# Altium PCB WIFIModule_M_V2.0.1.PcbDoc
Units mm, origin at the board's own origin, x right, y up, seen from the top; angles counter-clockwise.
Board outline 50 x 45 mm, 2 copper layers (Top Layer, Bottom Layer); 59 components, 64 nets, 253 pads, 83 vias.
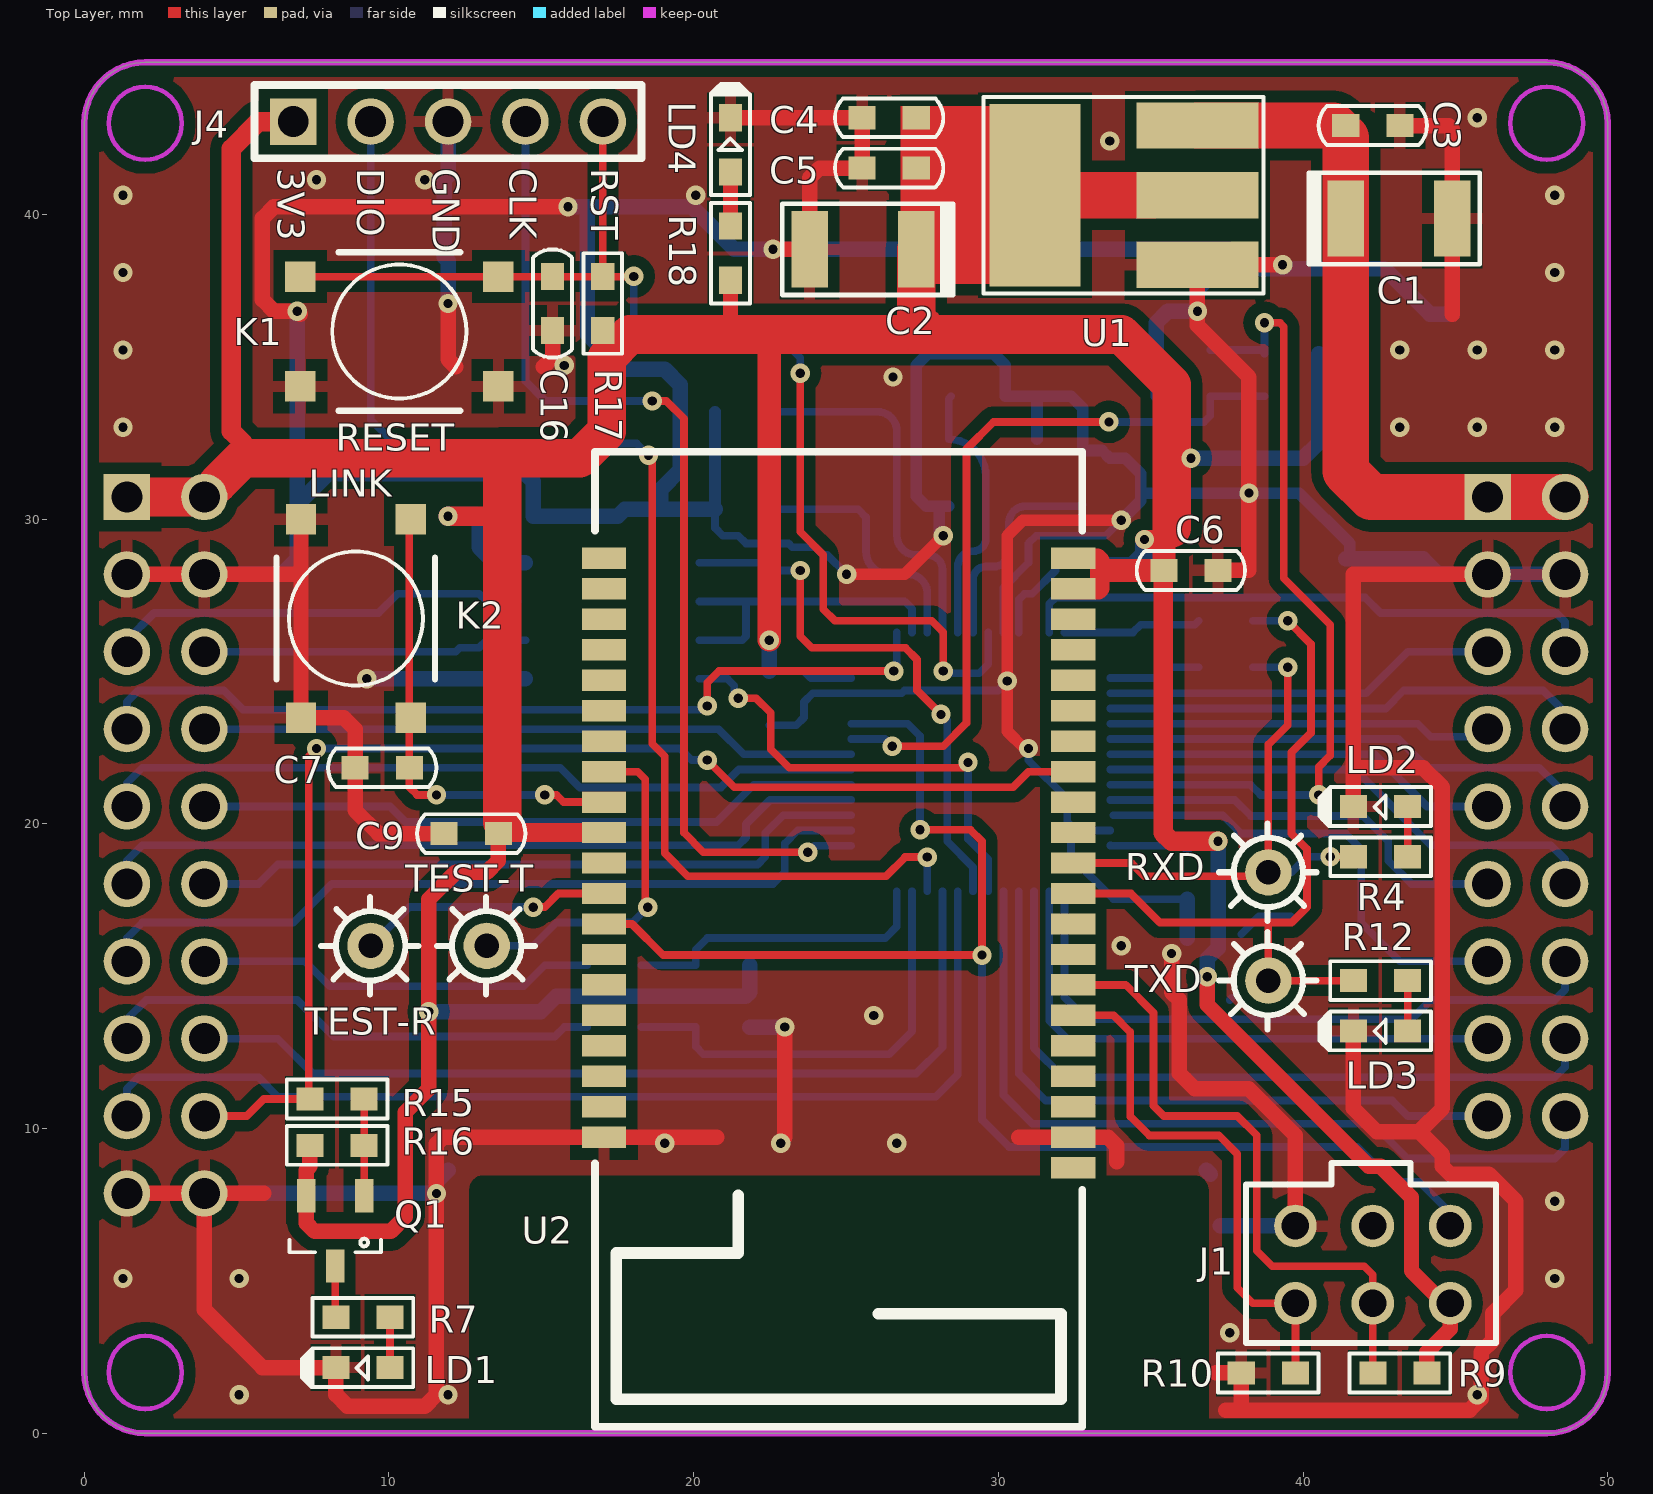
[diagram p0: Top Layer view]
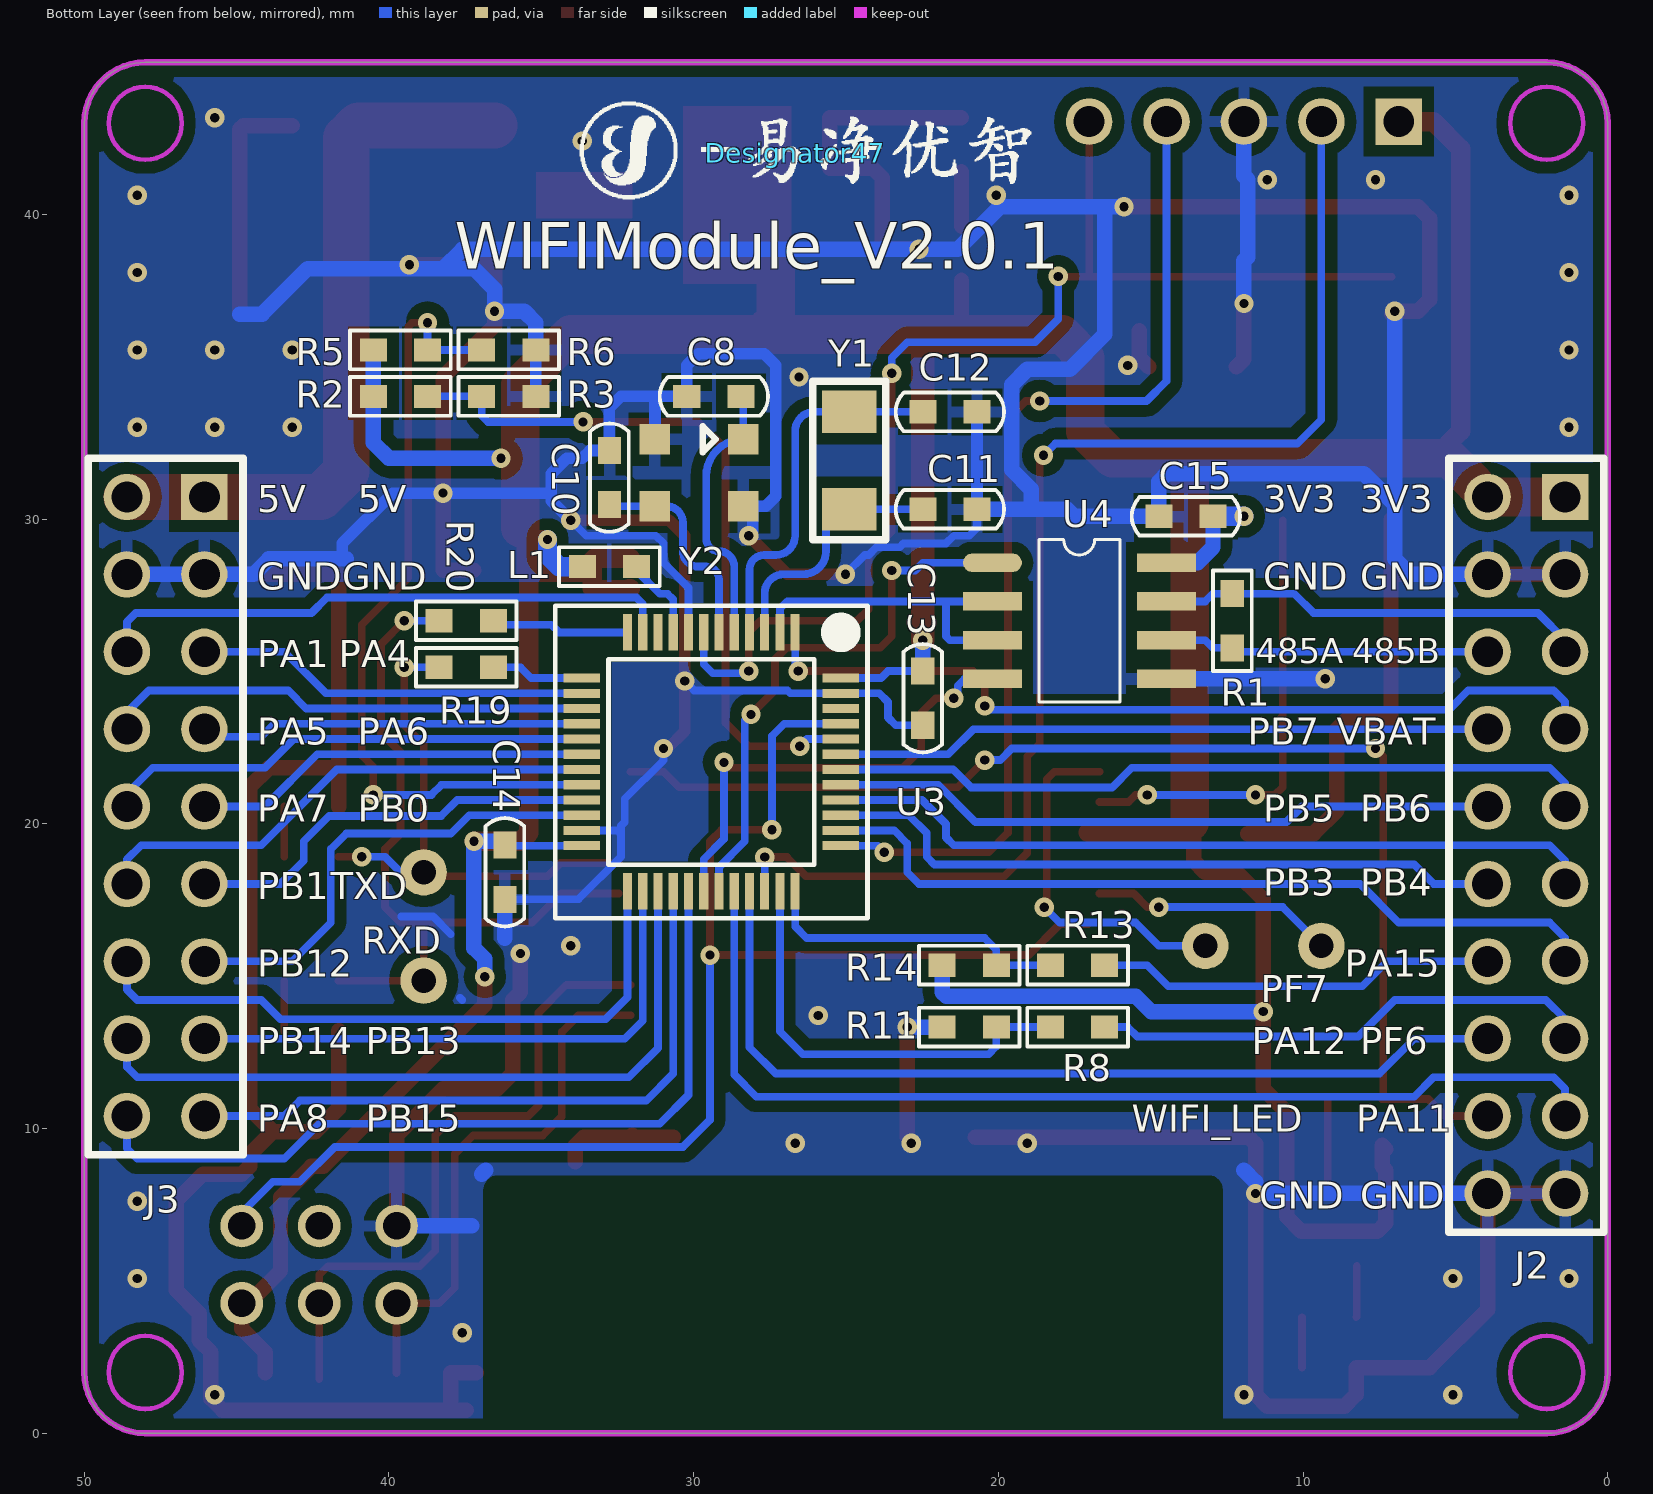
[diagram p1: Bottom Layer view, seen from below]

## Layer stack, top to bottom
Top Layer: signal copper 0.0356
Dielectric: dielectric 0.32, FR-4, Dk 4.8
Bottom Layer: signal copper 0.0356

## Board outline
2,0 cw(c2,2) 0,2 0,43 cw(c2,43) 2,45 48,45 cw(c48,43) 50,43 50,2 cw(c48,2) 48,0

## Design rules (kind name [scope] priority, off if disabled: settings)
Clearance [All] p1: gap=0.178
ComponentClearance [All] p1: gap=0.127 collisioncheckmode=2 verticalgap=0.254
DiffPairsRouting DiffPair_DiffPairsRouting [InDifferentialPair ('NewDifferentialPair1')] p1: maxlimit=2.54 minlimit=0.152 mostfreqgap=0.152 maxuncoupledlength=12.7
DiffPairsRouting [All] p2: maxlimit=2.54 minlimit=0.152 mostfreqgap=0.152 maxuncoupledlength=12.7
MatchedLengths DiffPair_MatchedLengths [InDifferentialPair ('NewDifferentialPair1')] p1: tolerance=25.4 checknetsindiffpair=TRUE checkdiffpairvsdiffpair=TRUE checkothers=TRUE
PlaneClearance [All] p1: clearance=0.15
PlaneConnect [All] p1: planeconnectstyle=Relief reliefexpansion=0.508 reliefentries=4 reliefconductorwidth=0.508 reliefairgap=0.254
PolygonConnect [All] p1: connectstyle=Relief reliefconductorwidth=0.381 reliefentries=4 polygonreliefangle="90 Angle"
RoutingCorners [All] p1: cornerstyle=Round minsetback=10 maxsetback=10
RoutingVias [All] p1: holewidth=0.711 width=1.27 viastyle="Through Hole" minholewidth=0.305 minwidth=0.635 maxholewidth=1.27 maxwidth=1.27
SolderMaskExpansion [All] p1: expansion=0.102
TestPointUsage [All] p1: valid=0 allowmultiple=FALSE
Testpoint [All] p1: side=15 testpointundercomponent=TRUE minsize=1.016 maxsize=2.54 preferedsize=1.524 minholesize=0 maxholesize=1.016 preferedholesize=0.813 testpointgrid=0.025 style=1021 order=0123456789
Width DiffPair_Width [InDifferentialPair('NewDifferentialPair1')] p1: maxlimit=0.381 minlimit=0.381 preferedwidth=0.381
Width [All] p2: maxlimit=5.08 minlimit=0.254 preferedwidth=0.381
14 further rules are at their usual default settings.

## Components (designator, comment, footprint, x,y, rotation, side; value= is the part's Value field where it differs from the comment)
C1 "47uF/25V" C_TAN_B 41.402,39.878 r0 top
C2 "47uF/25V" C_TAN_B 27.305,38.862 r180 top
C3 "0.1uF" 0603_C 41.402,42.926 r0 top
C4 "0.1uF" 0603_C 27.305,43.18 r180 top
C5 "1uF" 0603_C 27.305,41.529 r180 top
C6 "0.1uF" 0603_C 37.211,28.321 r180 top
C7 "0.1uF" 0603_C 10.668,21.844 r180 top
C8 "22PF" 0603_C 28.448,34.036 r0 bottom
C9 "0.1uF" 0603_C 11.811,19.685 r0 top
C10 "22PF" 0603_C 32.766,30.48 r90 bottom
C11 "10PF" 0603_C 22.479,30.328 r180 bottom
C12 "10PF" 0603_C 22.479,33.528 r180 bottom
C13 "Cap" 0603_C 22.479,25.019 r270 bottom
C14 "Cap" 0603_C 36.195,19.304 r270 bottom
C15 "Cap" 0603_C 12.954,30.099 r0 bottom
C16 "Cap" 0603_C 15.367,36.195 r90 top
Designator47 "Comment" PIC_AIRFACTORY-1500 26.67,42.037 r180 bottom
J1 "header-2x3-2d54" HT8550_FLASH_LOADER 42.291,5.537 r180 top
J2 "Header2X10" DIP20-2.54-2.54 1.397,30.734 r270 bottom
J3 "HEADER2X9" DIP18-2.54-2.54 46.063,30.734 r270 bottom
J4 "XH2.54-5P" SIP5 6.858,43.053 r0 top
K1 "KEY" KEY_SMD5465 13.589,34.366 r180 top
K2 "KEY" KEY_SMD5465 7.112,23.495 r90 top
L1 "Inductor" 0603_R 33.655,28.448 r180 bottom
LD1 "WHITE" LED_0603 10.033,2.159 r180 top
LD2 "LED_B" LED_0603 43.434,20.574 r180 top
LD3 "LED_Y" LED_0603 43.434,13.208 r180 top
LD4 "LED_B" LED_0603 21.209,41.402 r90 top
Q1 "2N3906" SOT23 9.184,7.798 r270 top (schematic designator Q3)
R1 "120Ω" 0603_R 12.319,27.559 r270 bottom
R2 "NC" 0603_R 38.735,34.036 r0 bottom
R3 "10K" 0603_R 35.179,34.036 r0 bottom
R4 "1K" 0603_R 41.656,18.923 r0 top
R5 "NC" 0603_R 38.735,35.56 r0 bottom
R6 "10K" 0603_R 35.179,35.56 r0 bottom
R7 "470" 0603_R 10.033,3.81 r180 top
R8 "NC" 0603_R 16.51,13.335 r0 bottom
R9 "10K" 0603_R 44.069,1.981 r180 top
R10 "10K" 0603_R 37.973,1.981 r0 top
R11 "0R" 0603_R 20.066,13.335 r0 bottom
R12 "1K" 0603_R 41.656,14.859 r0 top
R13 "NC" 0603_R 16.51,15.367 r0 bottom
R14 "0R" 0603_R 20.066,15.367 r0 bottom
R15 "4.7K" 0603_R 9.184,10.973 r180 top
R16 "47K" 0603_R 7.406,9.449 r0 top
R17 "10K" 0603_R 17.018,37.973 r270 top
R18 "1K" 0603_R 21.209,37.846 r90 top
R19 "1K" 0603_R 36.576,25.146 r0 bottom
R20 "1K" 0603_R 36.576,26.67 r0 bottom
RXD "Wi-Fi_TXD" TP_60_30 38.862,18.415 r0 top (schematic designator TP1)
TEST-R "TEST_RX" TP_60_30 9.398,16.002 r0 top (schematic designator TP4)
TEST-T "TEST_TX" TP_60_30 13.208,16.002 r0 top (schematic designator TP3)
TXD "Wi-Fi_RXD" TP_60_30 38.862,14.859 r0 top (schematic designator TP2)
U1 "AMS1117-3.3" SOT223 33.869,40.64 r0 top
U2 "WIFI_3165" EMW3165-P 17.058,28.719 r180 top
U3 "STM32F103C8T6" LQFP48 26.67,26.289 r0 bottom
U4 "MAX3485ESA" SO8 20.193,28.575 r180 bottom
Y1 "32.768K" 3215 24.892,33.528 r270 bottom
Y2 "8MHz" CRY_S3225 29.972,31.623 r270 bottom

## Footprints (in the part's own frame and the unit in brackets; to place one, negate y for a bottom-side part, rotate by r counter-clockwise, add the part's x,y. Pads: shape width x height; smd on the part's side, far side on the other; paste and mask are expansions set on the pad)
0603_C [mil]
  rect 35x30 smd: 1(0,0) 2(70,0)
  silkscreen extent -35,-25 105,25, body extent 5,-15 65,15, height 39
0603_R [mil]
  rect 35x30 smd: 1(0,0) 2(70,0)
  silkscreen extent -30,-25 100,25, body extent 5,-15 65,15, height 39
3215 [mm]
  rect 1.4x1.8 smd: 1(0,0) 2(3.2,0)
  silkscreen extent -1,-1.2 4.2,1.2
C_TAN_B [mm]
  rect 1.2x2.5 smd: 1(0,0) 2(3.5,0)
  silkscreen extent -1.24,-1.5 4.39,1.53, body extent 0,-1.5 3.5,1.5, height 2
CRY_S3225 [mm]
  rect 1x1 smd: 1(-1.005,1.602) 2(-1.005,-1.298) 3(1.195,-1.298) 4(1.195,1.602)
  silkscreen extent -1.44,0.27 -0.57,0.7, body extent -1.61,-1.9 1.8,2.2, height 1
DIP18-2.54-2.54 [mil]
  rect 60x60 hole 40: 1(0,0)
  round 60 hole 40: 2(0,-100) 3(100,0) 4(100,-100) 5(200,0) 6(200,-100) 7(300,0) 8(300,-100) 9(400,0) 10(400,-100) 11(500,0) 12(500,-100) 13(600,0) 14(600,-100) 15(700,0) 16(700,-100) 17(800,0) 18(800,-100)
  silkscreen extent -50,-150 850,50
DIP20-2.54-2.54 [mil]
  rect 60x60 hole 40: 1(0,0)
  round 60 hole 40: 2(0,-100) 3(100,0) 4(100,-100) 5(200,0) 6(200,-100) 7(300,0) 8(300,-100) 9(400,0) 10(400,-100) 11(500,0) 12(500,-100) 13(600,0) 14(600,-100) 15(700,0) 16(700,-100) 17(800,0) 18(800,-100) 19(900,0) 20(900,-100)
  silkscreen extent -50,-150 950,50
EMW3165-P [mm]
  rect 1.45x0.7 smd: 1(0,0) 2(0,1) 3(0,2) 4(0,3) 5(0,4) 6(0,5) 7(0,6) 8(0,7) 9(0,8) 10(0,9) 11(0,10) 12(0,11) 13(0,12) 14(0,13) 15(0,14) 16(0,15) 17(0,16) 18(0,17) 19(0,18) 20(0,19) 21(-15.4,19) 22(-15.4,18) 23(-15.4,17) 24(-15.4,16) 25(-15.4,15) 26(-15.4,14) 27(-15.4,13) 28(-15.4,12) 29(-15.4,11) 30(-15.4,10) 31(-15.4,9) 32(-15.4,8) 33(-15.4,7) 34(-15.4,6) 35(-15.4,5) 36(-15.4,4) 37(-15.4,3) 38(-15.4,2) 39(-15.4,1) 40(-15.4,0) 41(-15.4,20)
  silkscreen extent -15.7,-3.5 0.3,28.5, body extent -16.23,-3.63 0.83,28.63, height 3
HT8550_FLASH_LOADER [mm]
  round 1.4 hole 0.9: 1(-2.54,1.27) 2(-2.54,-1.27) 3(0,1.27) 4(0,-1.27) 5(2.54,1.27) 6(2.54,-1.27)
  silkscreen extent -4.04,-3.33 4.16,2.57, body extent -4.04,-3.33 4.16,2.57, height 2.54
KEY_SMD5465 [mm]
  rect 1x1 smd: 1(0,0) 2(0,-3.6) 3(6.5,0) 4(6.5,-3.6)
  silkscreen extent 1.05,-4.4 5.45,0.8, body extent -0.25,-4.06 6.73,0.46, height 1.5
LED_0603 [mil]
  rect 35x30 smd: A(0,0) K(70,0)
  silkscreen extent -30,-25 114,25
LQFP48 [mm]
  rect 0.3x1.2 smd: 1(0,0) 2(0.5,0) 3(1,0) 4(1.5,0) 5(2,0) 6(2.5,0) 7(3,0) 8(3.5,0) 9(4,0) 10(4.5,0) 11(5,0) 12(5.5,0) 25(5.5,8.5) 26(5,8.5) 27(4.5,8.5) 28(4,8.5) 29(3.5,8.5) 30(3,8.5) 31(2.5,8.5) 32(2,8.5) 33(1.5,8.5) 34(1,8.5) 35(0.5,8.5) 36(0,8.5)
  rect 1.2x0.3 smd: 13(7,1.5) 14(7,2) 15(7,2.5) 16(7,3) 17(7,3.5) 18(7,4) 19(7,4.5) 20(7,5) 21(7,5.5) 22(7,6) 23(7,6.5) 24(7,7) 37(-1.5,7) 38(-1.5,6.5) 39(-1.5,6) 40(-1.5,5.5) 41(-1.5,5) 42(-1.5,4.5) 43(-1.5,4) 44(-1.5,3.5) 45(-1.5,3) 46(-1.5,2.5) 47(-1.5,2) 48(-1.5,1.5)
  silkscreen extent -2.38,-0.88 7.88,9.38
PIC_AIRFACTORY-1500 [mm]
  silkscreen extent -7.06,-1.52 7.75,1.65
SIP5 [mil] "SIP5"
  rect 60x60 hole 40: 1(0,0)
  round 60 hole 40: 2(100,0) 3(200,0) 4(300,0) 5(400,0)
  silkscreen extent -50,-47 450,47
SO8 [mil]
  oval 76x24 smd: 1(0,0)
  rect 76x24 smd: 2(0,-50) 3(0,-100) 4(0,-150) 5(225,-150) 6(225,-100) 7(225,-50) 8(225,0)
  silkscreen extent 60,-180 165,30
SOT23 [mm]
  rect 1.092x0.6 smd: 1(0,0) 2(0,-1.9) 3(2.308,-0.95)
  silkscreen extent 1.41,-2.45 1.85,0.55, body extent 0.45,-2.45 1.85,0.55, height 1.1
SOT223 [mil]
  rect 157.48x60 smd: 1(105,-90) 2(105,0) 3(105,90)
  rect 118.11x236.22 smd: 4(-105,0)
  silkscreen extent -172,-127 190,127
TP_60_30 [mil]
  round 60 hole 31.5: 1(0,0)
  silkscreen extent -64,-63 62,63

## Part data
C1 C2: library part ECAP, "E-CAP"
C3 C4 C5 C6 C9: library part "Cap Semi_1", "Capacitor"
C7: library part "CAP NP"
C8 C10 C11 C12: library part Cap, "Capacitor"
C13 C14 C15 C16: "Capacitor"
J4: library part "Header 5H", "Header, 5-Pin, Right Angle"
LD1: library part LED, "LED"
LD2 LD3 LD4: library part LED
Q1: library part PNP
R1: library part RES1
R2 R3 R5 R6 R7 R8 R9 R10 R11 R13 R14 R15 R16 R17 R19 R20: library part Res3, "Resistor"
R4 R12 R18: library part R
RXD TEST-R TEST-T TXD: library part "T POINT A"
U4: library part MAX485
Y1: library part XTAL, "Crystal Oscillator"
Y2: library part CRYSTAL_S4_1, "CRYSTAL_S4_PASSIVE"

## Via types
v1: diameter 0.635, hole 0.305, Top Layer to Bottom Layer, tented both sides, 83 vias

## Nets (pads, with @x,y where several pads share a name; then routed paths per layer and width w, separated by ;. In a path a pad name is that pad's centre, name@x,y a point inside that pad or via, vN(x,y) a via of type N, cw(c..) or ccw(c..) an arc to the next point about the centre after c; other vN are vias at no path point)
485_A: J2.6 R1.2 U4.6 | length 10.7
  Bottom Layer w0.254: J2.6 12.192,25.654 R1.2 12.954,25.781 13.208,26.035 U4.6
485_B: J2.5 R1.1 U4.7 | length 13.9
  Bottom Layer w0.254: J2.5 1.397,26.035 2.286,26.924 9.652,26.924 10.287,27.559 12.954,27.559 13.208,27.305 U4.7@14.224,27.305
485_CTRL: U3.2 U4.2 U4.3 | length 10.6
  Bottom Layer w0.254: U4.3 21.59,26.035 21.717,26.162 21.717,27.305 ; U4.2 26.924,27.305 27.17,27.059 U3.2
+3.3V: C2.1 C4.1 C5.1 C6.2 C9.2 C13.1 C14.1 C15.1 J1.1 J2.1 J2.2 J4.1 L1.1 Q1.2 R2.2 R5.2 R9.1 R14.2 R16.1 R17.2 R18.1 U1.2 U1.4 U2.10 U2.39 U2.40 U3.24 U3.48 U4.8 | length 178.2
  Top Layer w0.508: R16.1@7.284,9.327 R16.1 7.406,8.758 7.284,8.636 7.284,6.903 7.558,6.629 10.058,6.629 10.541,7.112 10.541,10.541 11.303,11.303 11.303,17.526 12.192,18.415 13.208,18.415 13.589,18.796 C9.2 ; 14.16,31.559 14.224,31.623 ; 21.209,36.449 R18.1 ; 35.814,32.004 v1(36.322,32.004) ; v1(36.855,14.986) 36.855,14.072 42.164,8.763 42.545,8.763 43.561,7.747 43.561,5.334 44.628,4.267 J1.1 44.831,3.429 44.069,2.667 R9.1
  Top Layer w0.635: 5.207,32.512 4.826,32.893 4.826,42.164 5.715,43.053 J4.1 ; v1(11.938,30.099) 13.081,30.099 ; C9.2@13.809,19.719 U2.10 ; U2.40@32.077,28.719 33.257,28.719 33.325,28.651 33.325,27.737 33.274,27.686 32.11,27.686 32.077,27.719 U2.39@32.11,27.719 ; v1(34.798,29.337) 35.433,29.337 ; C6.2@35.408,28.477 35.408,19.71 35.687,19.431 v1(37.211,19.431)
  Top Layer w0.762: v1(22.479,26.035) 22.479,35.687 22.86,36.068 ; 33.452,28.321 C6.2 35.433,29.337
  Top Layer w1.27: J2.1 J2.2 ; J2.2@4.381,31.178 5.207,32.004 13.589,32.004 13.716,31.877 ; 13.716,20.066 13.716,32.004 16.256,32.004 17.145,32.893 17.145,35.306 17.907,36.068 34.036,36.068 35.687,34.417 35.687,29.718 ; C2.1 27.305,36.576 27.559,36.322
  Bottom Layer w0.254: C13.1 23.622,25.019 23.852,24.789 U3.48 ; U3.24@33.685,19.304 U3.24 36.18,19.289 C14.1
  Bottom Layer w0.508: v1(11.303,13.843) 14.986,13.843 15.494,14.351 21.717,14.351 21.844,14.478 R14.2 ; C15.1@12.827,30.099 12.954,29.972 12.954,29.083 13.462,28.575 U4.8 ; C13.1 v1(22.479,26.035) ; C14.1 36.322,19.431 v1(37.211,19.431) 37.211,15.926 36.855,15.57 v1(36.855,14.986) ; v1(36.322,32.004) 40.005,32.004 40.513,32.512 R5.2@40.513,35.433
  Bottom Layer w0.635: v1(11.938,30.099) C15.1@12.827,30.099 ; L1.1 34.417,28.448 34.798,28.829 v1(34.798,29.337)
+5V: C1.1 C3.1 J3.1 J3.2 U1.3 | length 23.5
  Top Layer w1.524: U1.3 40.996,42.926 41.402,42.52 41.402,31.572 42.24,30.734 J3.2
BOOT0: R2.1 R3.2 U3.44 | length 24.1
  Top Layer w0.254: v1(26.518,22.555) 28.194,22.555 28.956,23.317 28.956,32.309 29.845,33.198 v1(33.63,33.198)
  Bottom Layer w0.254: U3.44 26.284,22.789 v1(26.518,22.555) ; v1(33.63,33.198) 36.754,33.198 36.957,33.401 R3.2 R2.1
BOOT1: R5.1 R6.2 U3.20 | length 26.6
  Top Layer w0.254: v1(38.735,36.449) 39.243,36.449 39.37,36.322 39.37,28.067 40.894,26.543 40.894,22.25 40.513,21.869 v1(40.513,20.955)
  Bottom Layer w0.254: U3.20 38.274,21.289 38.608,20.955 v1(40.513,20.955) ; R6.2 R5.1 ; R5.1@38.735,35.433 v1(38.735,36.449)
EASY_LINK: C7.1 K2.2 K2.4 U2.9 | length 15.1
  Top Layer w0.254: K2.2@10.668,23.451 K2.2 K2.2@10.668,23.539 ; K2.4@10.668,29.972 10.668,21.209 10.922,20.955 v1(11.557,20.955) ; v1(15.113,20.955) 15.494,20.955 15.73,20.719 U2.9@16.677,20.719
  Bottom Layer w0.254: v1(11.557,20.955) v1(15.113,20.955)
GND: C1.2 C2.2 C3.2 C4.2 C5.2 C6.1 C7.2 C8.2 C9.1 C10.2 C11.2 C12.2 C13.2 C14.2 C15.2 C16.1 J1.6 J2.3 J2.4 J2.19 J2.20 J3.3 J3.4 J4.3 K1.1 K1.3 K2.1 K2.3 LD1.K LD2.K LD3.K LD4.K R3.1 R6.1 R10.1 R11.2 U1.1 U2.20 U2.21 U3.8 U3.23 U3.47 U4.5 Y2.2 Y2.4 | length 367.5
  Top Layer w0.254: 15.229,35.168 15.367,35.306
  Top Layer w0.381: v1(25.019,28.194) 26.924,28.194 v1(28.194,29.464) ; v1(30.988,22.479) 30.861,22.479 30.297,23.043 30.297,29.464 30.805,29.972 v1(34.036,29.972)
  Top Layer w0.508: J2.19 5.893,7.874 ; J2.3 7.112,28.194 ; J2.20 3.937,4.064 5.842,2.159 LD1.K 8.255,1.27 8.636,0.889 11.176,0.889 11.557,1.27 11.557,9.5 11.776,9.719 20.761,9.719 ; v1@7.089,36.726 v1(6.985,36.83) 6.223,36.83 5.842,37.211 5.842,39.878 6.223,40.259 v1(15.875,40.259) ; K2.3 K2.1 8.509,23.495 8.89,23.114 8.89,20.447 9.652,19.685 C9.1 ; v1(11.938,37.084) 11.938,35.255 12.192,35.001 ; 15.062,35.001 15.367,35.306 C16.1 ; LD4.K C4.2 C5.2 24.13,41.529 23.805,41.204 C2.2 v1(22.606,38.862) ; v1@22.987,9.719 v1(22.987,13.335) ; 30.674,9.719 33.604,9.719 33.884,9.44 33.884,8.915 ; U2.21@32.017,9.779 U2.21@32.077,9.719 ; v1(35.687,15.748) 35.687,14.478 35.941,14.224 35.941,11.811 36.449,11.303 38.227,11.303 39.751,9.779 J1.6 ; 37.135,1.981 R10.1 37.973,0.762 ; C6.1 38.227,28.321 38.227,34.671 36.536,36.362 U1.1 v1(39.33,38.354) ; 37.465,0.762 45.466,0.762 45.847,1.143 45.847,2.667 46.228,3.048 46.228,3.937 46.99,4.699 46.99,7.62 46.101,8.509 44.831,8.509 44.577,8.763 44.577,9.144 43.815,9.906 ; LD3.K 41.656,10.668 42.418,9.906 43.815,9.906 ; LD2.K 41.656,28.194 J3.3 ; 41.656,21.844 43.942,21.844 44.577,21.209 44.577,10.668 43.815,9.906 ; C3.2 44.78,42.926 44.902,42.804 44.902,36.734
  Bottom Layer w0.254: C11.2 20.701,29.718 20.955,29.464 21.463,29.464 21.717,29.21 23.114,29.21 23.241,29.083 24.003,29.083 24.257,28.829 24.384,28.829 v1(25.019,28.194) ; C13.2 23.368,23.241 23.622,23.495 23.622,24.003 23.908,24.289 26.829,24.289 26.924,24.384 29.987,24.384 v1@30.17,24.567 ; U3.8 30.17,27.757 30.988,28.575 30.988,29.21 31.242,29.464 33.528,29.464 v1(34.036,29.972) ; v1(30.988,22.479) 30.988,22.098 32.258,20.828 32.258,20.066 32.385,19.939 32.385,18.923 33.782,17.526 C14.2 ; 32.385,19.662 32.512,19.789 U3.23 ; 37.592,14.224 37.668,14.3 ; 37.973,16.383 38.557,16.967 39.599,16.967
  Bottom Layer w0.381: C11.2@20.701,30.226 C12.2 ; Y2.4@28.067,30.428 28.067,29.591 v1(28.194,29.464) ; Y2.4 27.634,30.428 27.305,30.757 27.305,35.052 27.686,35.433 29.845,35.433 30.226,35.052 C8.2 32.385,34.036 32.766,33.655 C10.2 33.401,32.258 33.655,32.004 34.163,32.004 34.671,31.496 34.671,30.607 v1(34.036,29.972) ; 31.242,34.036 31.27,34.008 Y2.2 ; 34.671,30.861 39.878,30.861 41.529,29.21 41.529,28.829 41.402,28.702 ; R3.1 R6.1
  Bottom Layer w0.508: J2.20 v1(11.557,7.874) ; J2.4 6.477,28.194 6.985,28.702 v1(6.985,36.83) ; 6.985,30.48 8.001,31.496 14.478,31.496 14.732,31.242 C15.2 17.501,30.099 17.73,30.328 C11.2 ; v1(9.271,24.765) U4.5 ; 11.557,8.255 11.938,8.636 ; v1(11.938,37.084) 11.938,38.481 11.811,38.608 11.811,41.148 11.938,41.275 J4.3 ; v1(15.875,40.259) 19.939,40.259 21.336,38.862 37.592,38.862 38.227,38.227 ; 16.51,40.005 16.51,36.068 17.653,34.925 19.05,34.925 19.558,34.417 19.558,31.623 18.923,30.988 18.923,30.328 ; R11.2 v1(22.987,13.335) ; R6.1@35.179,35.433 35.179,36.449 35.56,36.83 v1(36.536,36.83) 36.536,37.552 37.211,38.227 42.672,38.227 44.165,36.734 44.902,36.734 ; 36.195,16.256 C14.2 ; 36.83,8.636 36.957,8.509 ; 37.287,6.807 J1.6 ; 41.402,28.702 43.942,28.702 44.45,28.194 J3.3 J3.4
  other v1: 5.08,1.27 11.938,1.27 45.72,1.27 37.592,3.302 1.27,5.08 5.08,5.08 48.26,5.08 48.26,7.62 19.05,9.525 22.86,9.525 26.67,9.525 25.908,13.716 34.036,16.002 30.297,24.694 38.227,30.861 1.27,33.02 43.18,33.02 45.72,33.02 48.26,33.02 26.543,34.671 15.748,35.052 1.27,35.56 43.18,35.56 45.72,35.56 48.26,35.56 1.27,38.1 48.26,38.1 1.27,40.64 20.066,40.64 48.26,40.64 7.62,41.148 11.176,41.148 33.655,42.418 45.72,43.18
NetL1_2: L1.2 U3.9 | length 2.8
  Bottom Layer w0.254: U3.9 30.67,27.368 30.861,27.559 31.115,27.559 31.877,28.321 L1.2
NetLD1_A: LD1.A R7.1 | length 1.7
  Top Layer w0.254: LD1.A R7.1
NetLD2_A: LD2.A R4.2 | length 1.7
  Top Layer w0.254: R4.2 LD2.A
NetLD3_A: LD3.A R12.2 | length 1.7
  Top Layer w0.254: LD3.A R12.2
NetLD4_A: LD4.A R18.2 | length 1.8
  Top Layer w0.508: R18.2 LD4.A
NetQ1_1: Q1.1 R15.1 R16.2 | length 3.2
  Top Layer w0.254: Q1.1 R15.1
NetQ1_3: Q1.3 R7.2 | length 1.7
  Top Layer w0.254: Q1.3 8.234,3.831 R7.2
NRST: C16.2 J4.5 K1.2 K1.4 R17.1 U3.7 | length 40.1
  Top Layer w0.254: K1.4 v1@18.027,37.966 ; R17.1 J4.5 ; v1(23.495,34.798) 23.495,29.591 24.257,28.829 24.257,27.051 24.638,26.67 27.813,26.67 28.194,26.289 v1(28.194,25.019)
  Bottom Layer w0.254: v1(18.034,37.973) 18.034,36.576 18.796,35.814 22.987,35.814 23.495,35.306 v1(23.495,34.798) ; v1@28.194,24.946 29.368,24.946 29.67,25.248 U3.7
OSC32_IN: C11.1 U3.3 Y1.2 | length 8.5
  Bottom Layer w0.254: C11.1 Y1.2 25.4,30.328 25.654,30.074 25.654,28.956 ccw(c26.416,28.956) 26.416,28.194 27.051,28.194 cw(c27.051,27.575) 27.67,27.575 U3.3
OSC32_OUT: C12.1 U3.4 Y1.1 | length 12.2
  Bottom Layer w0.254: C12.1 26.035,33.528 cw(c26.035,32.893) 26.67,32.893 26.67,29.464 ccw(c27.305,29.464) 27.305,28.829 27.686,28.829 cw(c27.686,28.345) 28.17,28.345 U3.4
OSC_IN: C8.1 U3.5 Y2.1 | length 9
  Bottom Layer w0.254: C8.1 28.37,33.958 Y2.1 cw(c28.37,31.408) 29.591,31.408 29.591,29.369 cw(c29.178,29.369) 29.178,28.956 ccw(c29.178,28.448) 28.67,28.448 ; U3.5 28.67,28.416
OSC_OUT: C10.1 U3.6 Y2.3 | length 7.1
  Bottom Layer w0.254: U3.6 29.17,28.027 cw(c29.591,28.027) 29.591,28.448 29.845,28.448 ccw(c29.845,28.956) 30.353,28.956 30.353,29.892 cw(c30.889,29.892) 30.889,30.428 32.714,30.428 C10.1
PA1: J3.6 U3.11 | length 19.3
  Bottom Layer w0.254: U3.11 31.67,27.225 31.877,27.432 42.037,27.432 42.545,26.924 48.311,26.924 48.603,26.632 J3.6
PA4: J3.5 U3.14 | length 13
  Bottom Layer w0.254: U3.14 42.069,24.289 43.434,25.654 J3.5
PA5: J3.8 U3.15 | length 16
  Bottom Layer w0.254: U3.15 42.712,23.789 43.307,24.384 47.879,24.384 48.603,23.66 J3.8
PA6: J3.7 U3.16 | length 12.3
  Bottom Layer w0.254: U3.16 43.767,23.289 44.196,22.86 J3.7@45.809,22.86
PA7: J3.10 U3.17 | length 16.1
  Bottom Layer w0.254: U3.17 43.124,22.789 44.069,21.844 47.752,21.844 48.603,20.993 J3.10
PA8: J3.18 U3.29 | length 27.2
  Bottom Layer w0.254: U3.29 30.17,11.105 31.115,10.16 42.291,10.16 43.434,9.017 48.26,9.017 48.603,9.36 J3.18
PA11: J2.17 U3.32 | length 34.9
  Bottom Layer w0.254: J2.17 1.397,11.303 1.778,11.684 5.715,11.684 6.35,11.049 27.94,11.049 28.67,11.779 U3.32
PA12: J2.16 U3.33 | length 30.2
  Bottom Layer w0.254: J2.16 6.35,12.954 7.493,11.811 27.305,11.811 28.17,12.676 U3.33
PA15: J2.13 U3.38 | length 26.6
  Bottom Layer w0.254: J2.13 1.397,16.256 1.905,16.764 6.858,16.764 8.128,18.034 22.606,18.034 22.987,18.415 22.987,19.357 23.419,19.789 U3.38
PB0: J3.9 U3.18 | length 13.1
  Bottom Layer w0.254: U3.18 42.354,22.289 44.069,20.574 J3.9
PB1: J3.12 U3.19 | length 17
  Bottom Layer w0.254: U3.19 41.711,21.789 44.196,19.304 48.133,19.304 48.603,18.834 J3.12
PB3: J2.12 U3.39 | length 22.6
  Bottom Layer w0.254: J2.12 5.715,18.034 6.35,18.669 22.098,18.669 22.352,18.923 22.352,19.705 22.936,20.289 U3.39
PB4: J2.11 U3.40 | length 25.6
  Bottom Layer w0.254: J2.11 1.397,18.796 1.905,19.304 21.463,19.304 21.717,19.558 21.717,20.002 22.504,20.789 U3.40
PB5: J2.10 U3.41 | length 22
  Bottom Layer w0.254: J2.10 10.033,20.574 10.541,20.066 20.752,20.066 21.975,21.289 U3.41
PB6: J2.9 U3.42 | length 25.3
  Bottom Layer w0.254: J2.9 1.397,21.336 1.905,21.844 15.621,21.844 16.266,21.199 20.895,21.199 21.484,21.789 U3.42
PB7: J2.8 U3.43 | length 21.6
  Bottom Layer w0.254: J2.8 20.816,23.114 21.641,22.289 U3.43
PB12: J3.14 U3.25 | length 21.5
  Bottom Layer w0.254: U3.25 32.17,14.312 32.893,13.589 43.561,13.589 44.196,14.224 48.26,14.224 48.603,14.567 J3.14
PB13: J3.15 U3.26 | length 18.9
  Bottom Layer w0.254: U3.26 31.67,13.542 32.258,12.954 J3.15
PB14: J3.16 U3.27 | length 24
  Bottom Layer w0.254: U3.27 31.17,12.645 32.131,11.684 48.26,11.684 48.603,12.027 J3.16
PB15: J3.17 U3.28 | length 21.9
  Bottom Layer w0.254: U3.28 30.67,11.811 31.559,10.922 42.926,10.922 43.434,10.414 J3.17
PF6: J2.15 R8.1 | length 16.6
  Bottom Layer w0.254: J2.15 1.397,13.589 2.032,14.224 6.985,14.224 8.183,13.026 15.439,13.026 15.748,13.335 R8.1
PF7: J2.14 R13.1 | length 13.2
  Bottom Layer w0.254: J2.14 7.239,15.494 8.056,14.677 14.423,14.677 15.113,15.367 R13.1
PIN35: R8.2 R11.1 U3.35 | length 14.5
  Bottom Layer w0.254: R8.2 R11.1 20.066,12.7 20.32,12.446 26.416,12.446 27.17,13.2 U3.35
PIN36: R13.2 R14.1 U3.36 | length 10.4
  Bottom Layer w0.254: R13.2 R14.1 20.066,15.875 20.447,16.256 26.289,16.256 26.67,16.637 U3.36
PWRKEY: U3.46
PWRON: U3.10
RXD2_MCU: U3.31 U4.1 | length 18.1
  Top Layer w0.254: v1(23.495,28.321) 23.495,26.162 23.876,25.781 26.949,25.781 27.33,25.4 27.33,24.384 v1(28.118,23.597)
  Bottom Layer w0.254: U4.1 22.479,28.575 22.733,28.321 v1(23.495,28.321) ; v1(28.118,23.597) 28.321,23.393 28.321,19.431 29.17,18.582 U3.31
RXD3_MCU: J3.13 U3.22 | length 15.7
  Bottom Layer w0.254: U3.22@33.782,20.289 37.369,20.289 37.973,19.685 41.402,19.685 41.91,19.177 41.91,16.764 43.18,15.494 J3.13
RXD_MCU: R19.1 U3.13 | length 3.1
  Bottom Layer w0.254: U3.13 35.33,24.789 35.687,25.146 R19.1
SWCLK: J4.4 U3.37 | length 33.7
  Top Layer w0.254: v1(18.644,33.884) 19.101,33.884 19.685,33.299 19.685,19.71 20.32,19.075 v1(23.749,19.075)
  Bottom Layer w0.254: J4.4 14.478,34.544 15.138,33.884 v1(18.644,33.884) ; v1(23.749,19.075) 23.963,19.289 U3.37
SWD_SWCLK: J1.5 R10.2 U2.25 | length 18.1
  Top Layer w0.254: U2.25@32.077,13.719 33.779,13.719 34.327,13.171 34.327,10.402 34.95,9.779 37.236,9.779 37.846,9.169 37.846,4.775 38.354,4.267 J1.5 R10.2
SWD_SWDIO: J1.3 R9.2 U2.26 | length 21.6
  Top Layer w0.254: U2.26@32.077,14.719 34.176,14.719 35.092,13.803 35.092,10.755 35.433,10.414 37.846,10.414 38.481,9.779 38.481,5.994 38.989,5.486 42.012,5.486 42.291,5.207 R9.2@42.291,1.778
SWDIO: J4.2 U3.34 | length 43
  Top Layer w0.254: v1(18.517,32.106) 18.644,31.979 18.644,22.631 19.05,22.225 19.05,19.05 19.812,18.288 26.314,18.288 26.94,18.914 v1(27.67,18.914)
  Bottom Layer w0.254: J4.2 9.398,33.274 10.185,32.487 18.136,32.487 v1(18.517,32.106) ; U3.34 v1(27.67,18.914)
TEST_RXD: TEST-R.1 U2.12 | length 8.1
  Top Layer w0.254: TEST-R.1 TEST-R.1@9.525,16.002 ; v1(14.732,17.272) 15.113,17.272 15.56,17.719 U2.12@16.677,17.719
  Bottom Layer w0.254: TEST-R.1 10.668,17.272 v1(14.732,17.272)
TEST_TXD: TEST-T.1 U2.8 | length 11.9
  Top Layer w0.254: U2.8@16.677,21.719 18.159,21.719 18.415,21.463 18.415,17.348 v1(18.491,17.272)
  Bottom Layer w0.254: TEST-T.1 14.732,16.002 15.494,16.764 17.983,16.764 v1(18.491,17.272)
TXD2_MCU: U3.30 U4.4 | length 15.7
  Top Layer w0.254: v1@21.336,24.003 v1@21.463,24.003 ; v1(21.463,24.13) 22.047,24.13 22.53,23.647 22.53,22.454 23.139,21.844 28.829,21.844 v1(29.007,22.022)
  Bottom Layer w0.254: U4.4 21.107,24.765 21.336,24.536 v1@21.336,24.003 ; v1(29.007,22.022) 29.007,19.507 29.67,18.844 U3.30
TXD3_MCU: J3.11 U3.21 | length 13.9
  Bottom Layer w0.254: U3.21 37.758,20.789 38.282,20.265 41.965,20.265 42.799,19.431 42.799,18.796 43.561,18.034 J3.11
TXD_MCU: R20.1 U3.12 | length 4.6
  Bottom Layer w0.254: U3.12 34.417,26.289 34.671,26.543 36.449,26.543 R20.1
VBAT: J2.7 U3.1 | length 28.8
  Top Layer w0.254: v1(20.447,23.876) 20.447,24.638 20.828,25.019 v1(26.568,25.019)
  Bottom Layer w0.254: J2.7 1.397,24.003 1.778,24.384 4.572,24.384 5.207,23.749 20.32,23.749 v1(20.447,23.876) ; v1(26.568,25.019) 26.67,25.121 U3.1
WIFI_LED: J2.18 R15.2 U2.33 | length 40.4
  Top Layer w0.254: J2.18 5.334,10.414 5.893,10.973 R15.2 ; R15.2@7.366,11.049 7.366,22.225 v1(7.62,22.479) ; v1(20.447,22.098) 21.336,21.209 30.48,21.209 30.99,21.719 U2.33@32.077,21.719
  Bottom Layer w0.254: v1(7.62,22.479) 19.558,22.479 19.939,22.098 v1(20.447,22.098)
WIFI_RESET: J1.2 U2.13 U3.45 | length 46.6
  Top Layer w0.254: U2.13 17.977,16.719 18.999,15.697 v1(29.464,15.697) 29.464,19.431 29.083,19.812 v1(27.432,19.812)
  Bottom Layer w0.254: U3.45 27.028,23.289 27.432,22.885 v1@27.432,19.939 ; v1(29.464,15.697) 29.464,10.287 30.353,9.398 41.783,9.398 42.926,8.255 43.815,8.255 44.831,7.239 J1.2
WIFI_RXD: R12.1 R20.2 TXD.1 U2.29 | length 24.3
  Top Layer w0.254: U2.29 34.351,17.719 35.306,16.764 39.624,16.764 40.132,17.272 40.132,19.177 39.624,19.685 39.624,22.352 40.259,22.987 40.259,25.908 v1(39.497,26.67) ; 38.862,16.764 TXD.1 R12.1
  Bottom Layer w0.254: R20.2 v1(39.497,26.67)
WIFI_TXD: R4.1 R19.2 RXD.1 U2.30 | length 17.8
  Top Layer w0.254: U2.30 34.367,18.719 34.798,18.288 38.735,18.288 RXD.1 38.862,22.606 39.497,23.241 v1(39.497,25.146) ; v1(40.894,18.923) R4.1
  Bottom Layer w0.254: R19.2 v1(39.497,25.146) ; RXD.1 39.624,18.415 40.132,18.923 v1(40.894,18.923)
pads on no net: J1.4 U2.1 U2.2 U2.3 U2.4 U2.5 U2.6 U2.7 U2.11 U2.14 U2.15 U2.16 U2.17 U2.18 U2.19 U2.22 U2.23 U2.24 U2.27 U2.28 U2.31 U2.32 U2.34 U2.35 U2.36 U2.37 U2.38 U2.41

## Polygon pours and split planes (outlines as drawn)
GND on Top Layer "Top Layer-No Net" (solid, remove dead copper, pour order 1000): -0.87,46.297 48.863,46.297 50.743,44.418 50.743,0.399 49.396,-0.947 0.451,-0.947 -3.258,2.762 -3.258,43.91 -0.87,46.297
GND on Bottom Layer "Bottom Layer-No Net" (solid, remove dead copper, pour order 1001): -0.864,47.269 -0.864,0.457 0.813,-1.219 49.936,-1.219 52.045,0.889 52.045,43.434 48.743,46.736 0.051,46.736 -0.203,46.99

## Keep-outs
Keep-Out Layer:
  circle w0.152: c2,43 r1.2
  circle w0.152: c48,2 r1.2
  circle w0.152: c48,43 r1.2
  circle w0.152: c2,2 r1.2
  lines w0.203: 0,2 ccw(c2,2) 2,0 48,0 ccw(c48,2) 50,2 50,43 ccw(c48,43) 48,45 2,45 ccw(c2,43) 0,43 0,2

## Other copper
Top Layer:
  rectangle net +3.3V: 32.004,39.878 35.179,41.402
  rectangle net +3.3V: 26.797,37.719 30.353,43.561

## Silkscreen, mask and mechanical layers (free items; w line width, h text height)
Top Overlay:
  text "3V3" at 6.35,41.529 h0.89 r270
  text "DIO" at 8.966,41.529 h0.89 r270
  text "GND" at 11.43,41.529 h0.89 r270
  text "CLK" at 13.97,41.529 h0.89 r270
  text "RST" at 16.637,41.529 h0.89 r270
  text "RESET" at 8.255,32.258 h0.89
  text "LINK" at 7.366,30.734 h0.89
Bottom Overlay:
  text "WIFIModule_V2.0.1" at 37.846,38.227 h1.52
  text "3V3" at 8.128,30.226 h0.89
  text "3V3" at 11.303,30.226 h0.89
  text "5V" at 41.021,30.226 h0.89
  text "5V" at 44.323,30.226 h0.89
  text "GND" at 8.128,27.686 h0.89
  text "GND" at 11.303,27.686 h0.89
  text "GND" at 41.529,27.686 h0.89
  text "GND" at 44.323,27.686 h0.89
  text "485B" at 8.382,25.273 h0.81
  text "485A" at 11.557,25.273 h0.81
  text "PA4" at 41.656,25.146 h0.89
  text "PA1" at 44.323,25.146 h0.89
  text "VBAT" at 8.89,22.606 h0.89
  text "PB7" at 11.811,22.606 h0.89
  text "PA6" at 41.021,22.606 h0.89
  text "PA5" at 44.323,22.606 h0.89
  text "PB6" at 8.128,20.066 h0.89
  text "PB5" at 11.303,20.066 h0.89
  text "PB0" at 41.021,20.066 h0.89
  text "PA7" at 44.323,20.066 h0.89
  text "PB4" at 8.128,17.653 h0.89
  text "PB3" at 11.303,17.653 h0.89
  text "TXD" at 41.91,17.526 h0.89
  text "PB1" at 44.323,17.526 h0.89
  text "RXD" at 40.894,15.748 h0.89
  text "PA15" at 8.636,14.986 h0.89
  text "PB12" at 44.323,14.986 h0.89
  text "PF7" at 11.379,14.148 h0.89
  text "PF6" at 8.128,12.446 h0.89
  text "PA12" at 11.684,12.446 h0.89
  text "PB13" at 40.767,12.446 h0.89
  text "PB14" at 44.323,12.446 h0.89
  text "PA11" at 8.255,9.906 h0.89
  text "WIFI_LED" at 15.621,9.906 h0.89
  text "PB15" at 40.767,9.906 h0.89
  text "PA8" at 44.323,9.906 h0.89
  text "GND" at 8.128,7.366 h0.89
  text "GND" at 11.43,7.366 h0.89
Mechanical 1:
  circle w0.152: c48,2 r1.2
  circle w0.152: c2,43 r1.2
  circle w0.152: c48,43 r1.2
  circle w0.152: c2,2 r1.2
  lines w0.203: 0,2 ccw(c2,2) 2,0 48,0 ccw(c48,2) 50,2 50,43 ccw(c48,43) 48,45 2,45 ccw(c2,43) 0,43 0,2

## Text inside footprints (layer, text, board x,y; h text height)
J1: Mechanical 10 "3" at 42.774,4.42 h0.76 r180; Mechanical 10 "6" at 39.751,7.127 h0.76 r180; Mechanical 10 "1" at 44.831,4.587 h0.76 r180; Mechanical 10 "5" at 39.751,4.587 h0.76 r180; Mechanical 10 "4" at 42.291,7.127 h0.76 r180; Mechanical 10 "2" at 44.831,7.127 h0.76 r180